# Altium PCB Main.PcbDoc (part 2 of 2)
Units mil, origin at the board's own origin, x right, y up, seen from the top; angles counter-clockwise.
Board outline 5112 x 2752 mil, 4 copper layers (Signal Layer 1, Ground Plane, Voltage Plane, Signal Layer 2), stack 40.4 mil thick; 233 components, 150 nets, 676 pads, 338 vias.
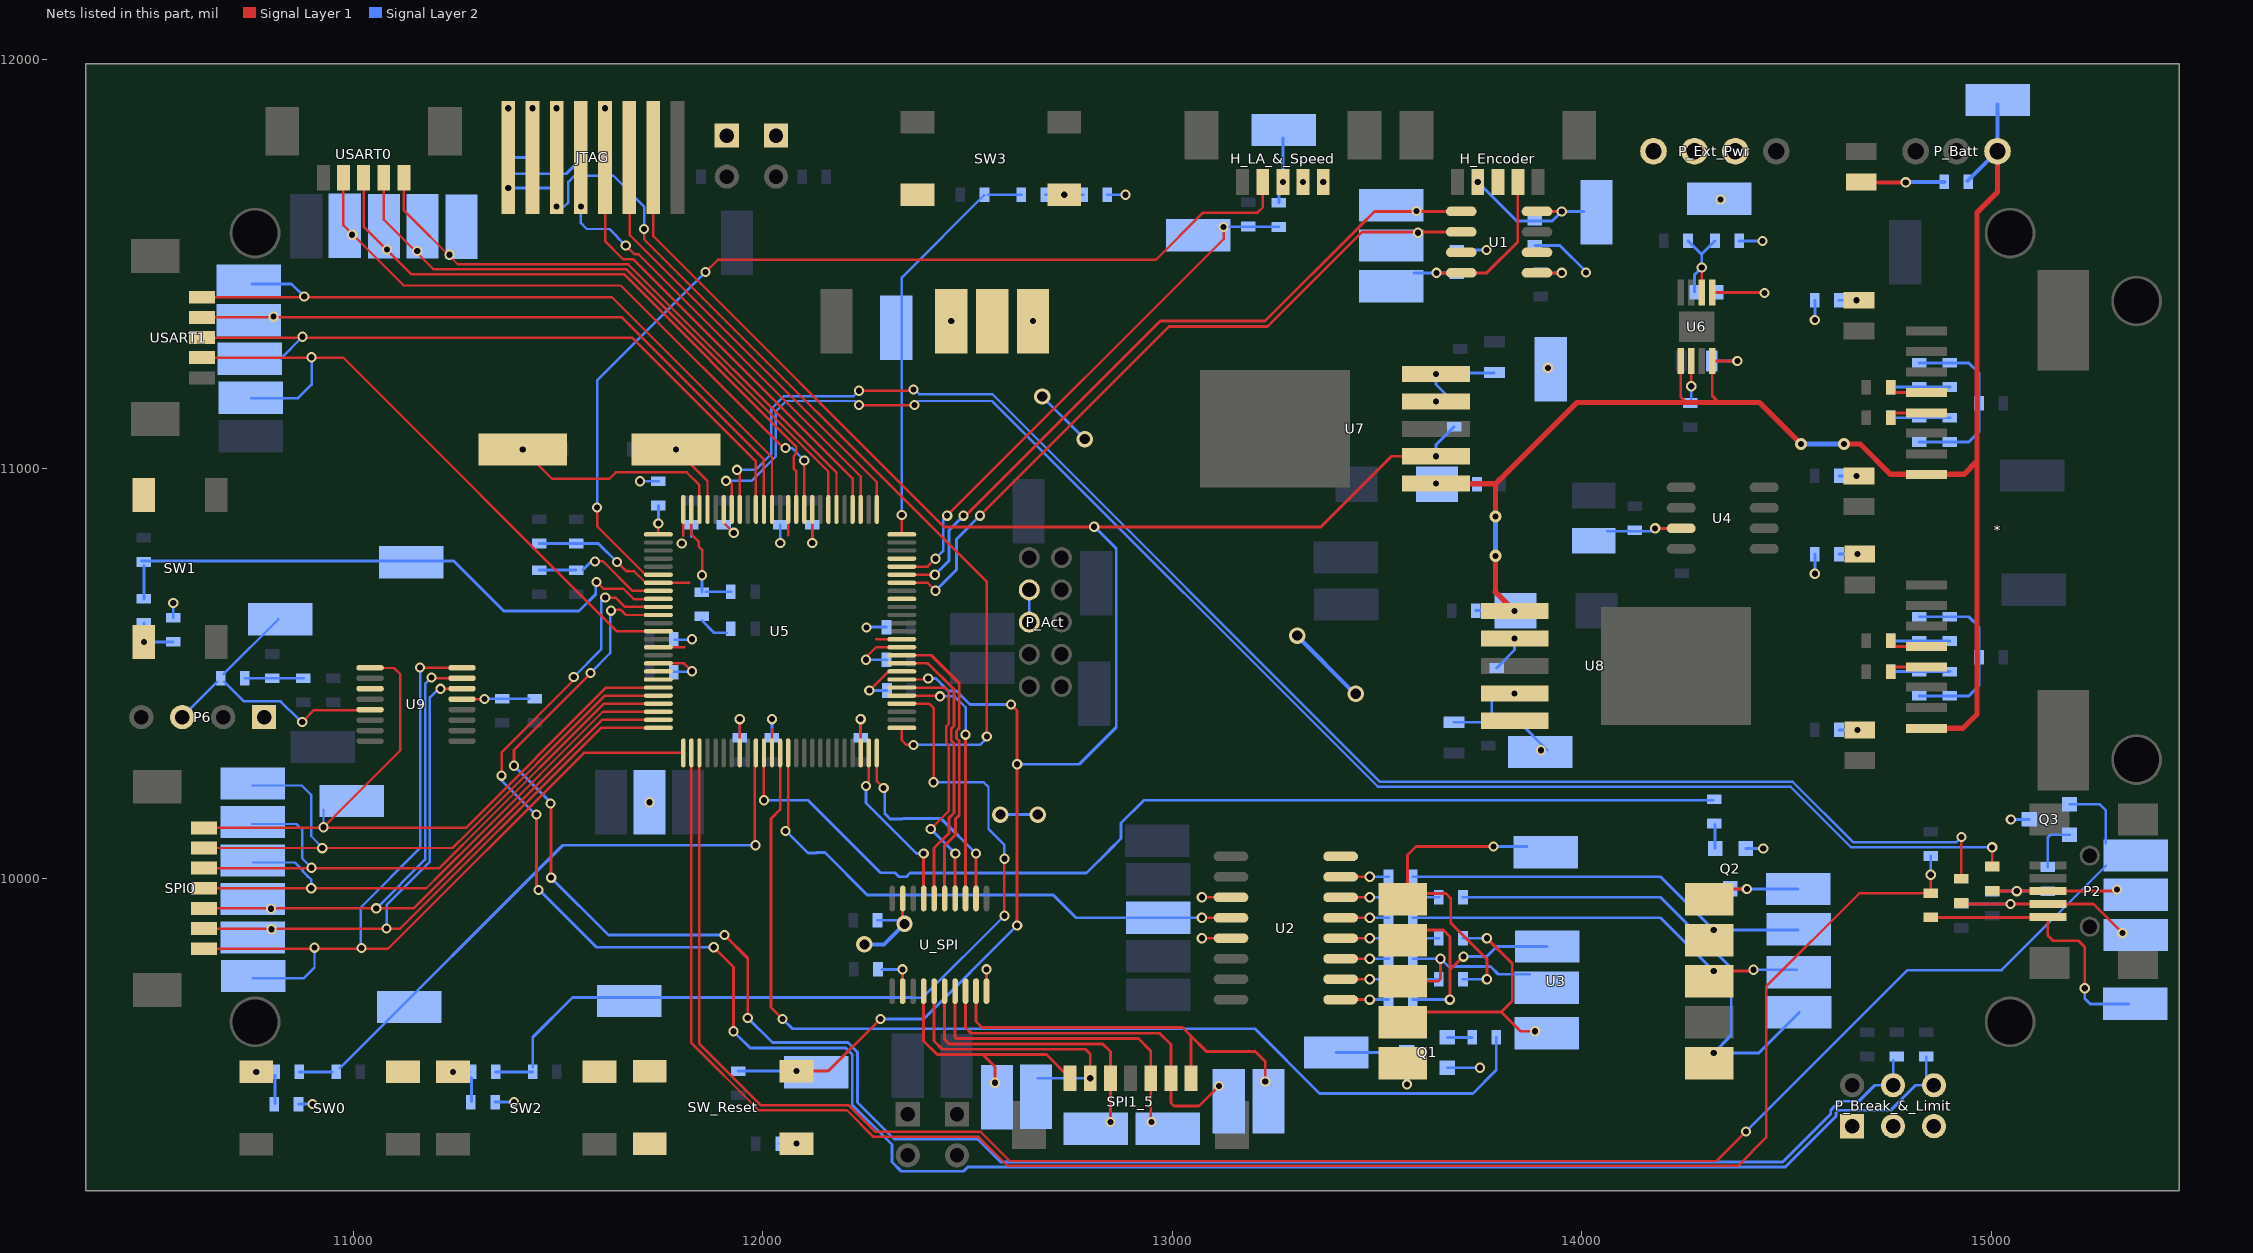
[diagram p4: the nets of this part, all layers, seen from the top]

## Via types
v1: diameter 25, hole 15, Signal Layer 1 to Signal Layer 2, 324 vias
v2: diameter 40, hole 25, Signal Layer 1 to Signal Layer 2, 10 vias
v3: diameter 30, hole 15, Signal Layer 1 to Signal Layer 2, 4 vias

## Nets (pads, with @x,y where several pads share a name; then routed paths per layer and width w, separated by ;. In a path a pad name is that pad's centre, name@x,y a point inside that pad or via, vN(x,y) a via of type N, cw(c..) or ccw(c..) an arc to the next point about the centre after c; other vN are vias at no path point) (continued)
LED_ENABLE: TP_LED_BI/BRO.1 U2.4 U5.39 | length 1381.2
  Signal Layer 1 w6: v1(12055,10115) 12056.68,10115 12061.68,10110 U5.39@12061.68,10305.76
  Signal Layer 1 w7: v1(13072,9903) U2.4@13143.14,9903
  Signal Layer 2 w7: v1(12055,10115) 12056.68,10115 12110.53,10061.15 12130.46,10061.15 12131.31,10062 12151.38,10062 12254.38,9959 12708.77,9959 12764.77,9903 v1(13072,9903)
LED_SELECT_LEFT: R17.2 U5.38 | length 2591.3
  Signal Layer 1 w6: 12042,10167 U5.38@12042,10305.76
  Signal Layer 1 w7: 12020,9688 12020,9684 v1(12048,9656) ; 12020,9689 12020,10145 12042,10167
  Signal Layer 2 w7: v1(12048,9656) 12072,9632 13201.57,9632 13359.36,9474.21 13734.21,9474.21 13791.06,9531.06 R17.2@13791.06,9611
LED_SELECT_RIGHT: R18.2 U5.36 | length 2611.3
  Signal Layer 1 w6: v1(12002.63,10190) U5.36@12002.63,10305.76
  Signal Layer 2 w7: v1(12002.63,10190) 12110,10190 12287,10013 12322.32,10013 12332.32,10003 12350.55,10003 12359.55,10012 12790.62,10012 12844.62,10066 12844.62,10066.62 12874.76,10096.76 12874.76,10134.31 12930.45,10190 R18.2@14320.94,10190
LIMIT_SENSE1: P_Break_&_Limit.4 R12.1 U5.11 | length 4772.3
  Signal Layer 1 w6: v1@11630,10648 11630.5,10647.5 11638,10655 11653.41,10655 11666.04,10642.37 U5.11@11744.76,10642.37
  Signal Layer 1 w7: v1(11392.08,10274.08) 11392,10274.16 11392,10312.38 11579,10499.38 v1(11579,10501) ; v1(11481.08,10182.08) 11482.84,10180.32 11482.84,10001 v1(11482.92,10000.92) ; v1(11906.08,9861.08) 11963,9804.16 11963,9658.16 v1(11963.08,9658.08)
  Signal Layer 2 w6: v1(11579,10501) 11627.08,10549.08 11627.08,10645.08 v1@11630,10648 ; P_Break_&_Limit.4@14760,9494 R12.1@14760,9555
  Signal Layer 2 w7: v1(11392.08,10274.08) 11481.08,10185.08 v1(11481.08,10182.08) ; v1(11482.92,10000.92) 11622.68,9861.16 11906,9861.16 v1(11906.08,9861.08) ; v1(11963.08,9658.08) 12023.16,9598 12207.93,9598 12231.24,9574.69 12231.24,9452.14 12320.4,9362.98 12524.63,9362.98 12580.62,9307 14491.38,9307 14607.97,9423.59 14607.97,9432.85 14630.1,9454.97 14676.17,9454.97 14715.19,9494 P_Break_&_Limit.4@14760,9494
  other v1: 11629,10653
LIMIT_SENSE2: P_Break_&_Limit.6 R13.1 U5.10 | length 5004.4
  Signal Layer 1 w6: v1@11370.16,10252.16 v1(11362,10250) 11362,10261.16 11362,10307 11538,10483 v1(11538,10491) ; v1@11623,10685 11640.38,10685 11663.32,10662.06 U5.10@11744.76,10662.06
  Signal Layer 1 w7: v1@11447,9979 v1@11447,10148 ; v1(11447,10155) v1@11454,10155 ; v1(11452,9971) v1@11453,9971 ; v1@11884.16,9826.84 11928,9783 v1(11928,9626)
  Signal Layer 2 w6: v1@11538.5,10491.5 11605.16,10558.16 11605.16,10677 11615,10677 v1(11615,10685) ; R13.1@14841,9564 14841,9513 P_Break_&_Limit.6@14860,9494
  Signal Layer 2 w7: v1@11363,10245 11363,10237 v1@11439.84,10160.16 ; v1(11447,10155) v1@11454,10155 ; v1(11452,9971) v1@11453,9971 ; v1@11461,9964 11594,9831 v1@11876,9831 ; v1@11935.86,9618.14 11969,9585 12202.55,9585 12218.24,9569.31 12218.24,9445.76 12314.97,9349.03 12314.97,9306.83 12337.83,9283.97 12490.17,9283.97 12500.19,9294 ; 12501,9294 14496.77,9294 14620.97,9418.2 14620.97,9427.46 14626.54,9433.03 14754.22,9433.03 14815.19,9494 P_Break_&_Limit.6@14860,9494
  other v1: 11880,9831
Net*_4: *.4 R5.1 | length 81.2
  Signal Layer 1 w7: R5.1@14754,11185.65 *.4@14835.22,11185.65
Net*_5: *.5 R2.1 | length 81.2
  Signal Layer 1 w7: R2.1@14754,11135.46 *.5@14835.22,11135.46
Net*_12: *.12 R33.1 | length 82.2
  Signal Layer 1 w7: R33.1@14754,10565.57 *.12@14836.2,10565.57
Net*_13: *.13 R30.1 | length 81.2
  Signal Layer 1 w7: R30.1@14754,10515.38 *.13@14835.22,10515.38
Net*_17: *.17 R37.2 | length 42.8
  Signal Layer 2 w7: R37.2@14628.06,11411.05 v1(14670.85,11411.05)
Net*_19: *.19 R38.2 | length 42.8
  Signal Layer 2 w7: R38.2@14628.06,10981.91 v1(14670.85,10981.91)
Net*_21: *.21 R39.2 | length 44.8
  Signal Layer 2 w7: R39.2@14628.06,10790.97 v1(14672.82,10790.97)
Net*_23: *.23 R40.2 | length 44.8
  Signal Layer 2 w7: R40.2@14628.06,10361.83 v1(14672.82,10361.83)
NetC1_2: C1.2 R1.2 R4.2 R27.2 R28.2 | length 455.7
  Signal Layer 2 w7: R1.2@14824,11064.94 14944.94,11064.94 14969.94,11089.94 14969.94,11233.06 14944.94,11258.06 R27.2@14824,11258.06
NetC5_2: C5.2 R29.2 R32.2 R35.2 R36.2 | length 455.7
  Signal Layer 2 w7: R29.2@14824,10444.94 R32.2@14899,10444.94 14944.94,10444.94 14969.94,10469.94 C5.2@14969.94,10539 14969.94,10613.06 14944.94,10638.06 R35.2@14899,10638.06 R36.2@14824,10638.06
NetC6_2: C6.2 R9.2 R10.1 | length 143.9
  Signal Layer 2 w6: R9.2@10735.06,10488 R10.1@10877,10488 R10.1@10879,10488
NetC8_1: C8.1 U5.1 | length 70.4
  Signal Layer 1 w6: U5.1@11744.76,10839.22 v1(11744.76,10865.76)
  Signal Layer 2 w7: v1(11744.76,10865.76) C8.1@11744.76,10909.61
NetC10_2: C10.2 R60.1 | length 73.4
  Signal Layer 2 w7: R60.1@11851,10629 11881,10599 C10.2@11911.94,10599
NetC11_2: C11.2 R60.2 U5.99 | length 273.4
  Signal Layer 1 w6: U5.99@11825.46,10900.24 11825.46,10838.94 11843.65,10820.76 11843.65,10809.09 11851.46,10801.28 v1(11851.46,10739.35)
  Signal Layer 2 w7: R60.2@11851.46,10698.52 v1(11851.46,10739.35) ; R60.2@11861,10699 C11.2@11921.94,10699
NetC15_1: C15.1 R62.1 R64.2 U6.2 | length 253.2
  Signal Layer 1 w7: U6.2@14292.87,11429.8 v1(14292.87,11491.13)
  Signal Layer 2 w7: R64.2@14259.13,11556.13 14292.87,11522.39 v1(14292.87,11491.13) 14275.07,11473.34 C15.1@14275.07,11431.13 ; 14292.87,11523.93 R62.1@14325.07,11556.13
NetC18_2: C18.2 U7.4 | length 43.2
  Signal Layer 2 w7: C18.2@13600.87,11163.93 v1(13644.06,11163.93)
NetC19_2: C19.2 U6.6 | length 100.1
  Signal Layer 1 w7: v1(14267.28,11201.13) U6.6@14267.28,11262.47
  Signal Layer 2 w7: C19.2@14267.28,11162.39 v1(14267.28,11201.13)
NetC24_2: C24.2 U8.4 | length 43.2
  Signal Layer 2 w7: v1(13835.94,10451.07) C24.2@13879.13,10451.07
NetC40_2: C40.2 U5.97 X1.2 | length 227.1
  Signal Layer 1 w6: v1(11787.71,11046.78) 11864.83,10969.65 U5.97@11864.83,10900.24
  Signal Layer 2 w7: C40.2@11739.06,11046.78 v1(11787.71,11046.78)
NetC41_1: C41.1 U5.98 X1.1 | length 581.7
  Signal Layer 1 w6: v1(11413.69,11046.78) 11485.47,10975 11625,10975 11641.06,10991.06 11813.94,10991.06 11845.15,10959.85 U5.98@11845.15,10900.24
  Signal Layer 2 w7: v1(11413.69,11046.78) C41.1@11455,11046.78
NetD_Power_1: D_Power.1 R66.1 | length 203.4
  Signal Layer 1 w10: D_Power.1@14682.6,11699 v1(14791,11699)
  Signal Layer 2 w10: v1@14790,11700 R66.1@14885,11700
NetH1_3: H_LA_&_Speed.3 R67.2 TP_Speed_H.1 | length 162.1
  Signal Layer 2 w7: R67.2@13260,11649.06 13260,11690 v1(13270,11700) TP_Speed_H.1@13270,11807
NetH2_2: H_Encoder.2 R7.1 TP_Encoder_A.1 U1.4 | length 368.6
  Signal Layer 1 w7: U1.4@13890.52,11628 v1(13951,11628)
  Signal Layer 2 w7: v1(13745.79,11700) 13840.79,11605 R7.1@13885,11605 13928,11605 v1(13951,11628) TP_Encoder_A.1@14005,11628
NetH2_4: H_Encoder.4 R8.1 TP_Encoder_B.1 U1.8 | length 472.7
  Signal Layer 1 w7: v1(13645,11478) U1.8@13705.48,11478 13768,11478 13843.62,11553.62 H_Encoder.4@13843.62,11699.41
  Signal Layer 2 w7: TP_Encoder_B.1@13590,11478 v1(13645,11478) R8.1@13687,11478
NetJTAG_2: JTAG.2 R49.2 | length 45
  Signal Layer 2 w7: R49.2@11437.36,11835 v1(11437.36,11880)
NetP2_1: P2.1 R70.2 TP_MONITOR.1 | length 635.4
  Signal Layer 1 w7: R70.2@14852,9903.94 P2.1@15100.94,9903.94 ; P2.1@15137.94,9905.01 15137.94,9860.06 15151,9847 15213,9847 15228,9832 v1(15228,9731)
  Signal Layer 2 w7: v1(15228,9731) 15228,9706 15242,9692 TP_MONITOR.1@15336,9692
NetP2_2: P2.2 R71.2 R74.2 TP_DDM.1 | length 539.2
  Signal Layer 1 w7: R71.2@14929.44,9936.5 v1(15047,9936.5) P2.2@15137.94,9936.5 15249.5,9936.5 v1(15320,9866)
  Signal Layer 2 w7: R74.2@14927.55,9936.5 v1(15047,9936.5)
NetP2_3: P2.3 R69.1 R72.2 R75.2 TP_DDP.1 | length 440.7
  Signal Layer 1 w7: R72.2@15002.94,9968 v1(15062,9968) P2.3@15137.94,9968 15303,9968 v1(15307,9972)
  Signal Layer 2 w7: R75.2@15002.94,9968 v1(15062,9968) R69.1@15137.94,9968
NetQ1_1: Q1.1 R17.1 | length 60.4
  Signal Layer 2 w7: Q1.1@13671.61,9611 R17.1@13732,9611
NetQ1_3: Q1.3 TP_LED_LEFT.1 U3.10 | length 310.6
  Signal Layer 1 w7: v1(13572.79,9496.21) U3.10@13572.79,9571.8
  Signal Layer 2 w7: TP_LED_LEFT.1@13400,9574 Q1.3@13565,9574 ; v1(13572.79,9496.21) Q1.3@13572.79,9566.21
NetQ2_1: Q2.1 R18.1 | length 58.2
  Signal Layer 2 w7: Q2.1@14325.6,10072.21 R18.1@14325.6,10130.4
NetQ2_3: Q2.3 TP_LED_RIGHT.1 U3.5 | length 245.2
  Signal Layer 1 w7: U3.5@14322.02,9973 v1(14403,9973)
  Signal Layer 2 w7: Q2.3@14363.79,9973 v1(14403,9973) TP_LED_RIGHT.1@14528,9973
NetQ3_2: Q3.2 R69.2 | length 127.9
  Signal Layer 2 w7: R69.2@15137.94,10027.06 15137.94,10098.94 15144.8,10105.8 Q3.2@15191.09,10105.8
NetR1_1: R1.1 R3.2 R4.1 | length 145
  Signal Layer 2 w7: R3.2@14754,11124 R4.1@14899,11124
NetR6_2: R6.2 U1.1 | length 110.4
  Signal Layer 1 w7: U1.1@13890.52,11478 v1(13951,11478)
  Signal Layer 2 w7: R6.2@13901.06,11478 v1(13951,11478)
NetR19_1: R19.1 TP_LED_Sa.1 U3.3 | length 992.1
  Signal Layer 1 w7: v1(14322.02,9773) 14416,9773 v1(14419,9776)
  Signal Layer 2 w7: R19.1@13587,9903 14192.02,9903 v1(14322.02,9773) ; v1(14419,9776) TP_LED_Sa.1@14524,9776
NetR19_2: R19.2 U2.13 | length 117.1
  Signal Layer 1 w7: U2.13@13410.86,9903 v1(13482,9903)
  Signal Layer 2 w7: v1(13482,9903) R19.2@13527.94,9903
NetR20_1: R20.1 TP_LED_Sb.1 U3.9 | length 606.3
  Signal Layer 1 w7: U3.9@13573.98,9673 13803,9673 ; v1(13768,9853) 13830,9791 13830,9700 13803,9673 ; v1(13886,9626) 13850,9626 13803,9673
  Signal Layer 2 w7: R20.1@13710,9853 v1(13768,9853)
NetR20_2: R20.2 U2.12 | length 240.1
  Signal Layer 1 w7: U2.12@13410.86,9853 v1(13482,9853)
  Signal Layer 2 w7: v1(13482,9853) R20.2@13650.94,9853
NetR21_1: R21.1 TP_LED_Sc.1 U3.8 | length 442.2
  Signal Layer 1 w7: U3.8@13562.98,9748 13649,9748 13655,9754 v1(13655,9803)
  Signal Layer 2 w7: R21.1@13589,9803 v1(13655,9803) 13674,9784 13777,9784 13796,9765 TP_LED_Sc.1@13872,9765
NetR21_2: R21.2 U2.11 | length 117.1
  Signal Layer 1 w7: U2.11@13410.86,9803 v1(13482,9803)
  Signal Layer 2 w7: v1(13482,9803) R21.2@13527.94,9803
NetR22_1: R22.1 TP_LED_Sd.1 U3.6 | length 767.1
  Signal Layer 1 w7: U3.6@13573.98,9962 13573.98,10055.98 13595,10077 v1(13784,10077) ; U3.6@13604,9962 13668,9962 13680,9950 13680,9890 13768,9802 v1(13768,9753)
  Signal Layer 2 w7: R22.1@13710,9753 v1(13768,9753) ; v1(13784,10077) TP_LED_Sd.1@13866,10077
NetR22_2: R22.2 U2.10 | length 240.1
  Signal Layer 1 w7: U2.10@13410.86,9753 v1(13482,9753)
  Signal Layer 2 w7: v1(13482,9753) R22.2@13650.94,9753
NetR23_1: R23.1 TP_LED_Se.1 U3.7 | length 615.7
  Signal Layer 1 w7: U3.7@13573.98,9873 13662,9873 13677.63,9857.37 13677.63,9776 v1(13677.63,9703) ; 13678,9776 13710,9808 v1(13711,9808)
  Signal Layer 2 w7: R23.1@13587,9703 v1(13677.63,9703) ; v1(13711,9808) 13767,9808 13792,9833 TP_LED_Se.1@13915,9833
NetR23_2: R23.2 U2.9 | length 117.1
  Signal Layer 1 w7: U2.9@13410.86,9703 v1(13482,9703)
  Signal Layer 2 w7: v1(13482,9703) R23.2@13527.94,9703
NetR24_1: R24.1 TP_LED_Sf.1 U3.4 | length 994.8
  Signal Layer 2 w7: R24.1@13587,10003 14192.02,10003 v1(14322.02,9873) TP_LED_Sf.1@14528,9873
NetR24_2: R24.2 U2.15 | length 117.1
  Signal Layer 1 w7: U2.15@13410.86,10003 v1(13482,10003)
  Signal Layer 2 w7: v1(13482,10003) R24.2@13527.94,10003
NetR25_1: R25.1 TP_LED_Sg.1 U3.1 | length 1201.5
  Signal Layer 2 w7: R25.1@13710,9953 14192,9953 14365,9780 14365,9615.98 v1(14322.02,9573) 14432,9573 TP_LED_Sg.1@14531,9672
NetR25_2: R25.2 U2.14 | length 240.1
  Signal Layer 1 w7: U2.14@13410.86,9953 v1(13482,9953)
  Signal Layer 2 w7: v1(13482,9953) R25.2@13650.94,9953
NetR26_2: R26.2 R27.1 R28.1 | length 145
  Signal Layer 2 w7: R26.2@14754,11199 R28.1@14899,11199
NetR29_1: R29.1 R31.2 R32.1 | length 145
  Signal Layer 2 w7: R31.2@14754,10504 R32.1@14899,10504
NetR34_2: R34.2 R35.1 R36.1 | length 145
  Signal Layer 2 w7: R34.2@14754,10579 R35.1@14899,10579
NetR45_1: R45.1 R50.1 SW1.3 SW1.4 | length 117.2
  Signal Layer 2 w7: R50.1@10488.52,10622.73 v1(10488.52,10576.87) R45.1@10559.87,10576.87
NetR52_1: R52.1 R53.1 SW2.3 SW2.4 | length 98.9
  Signal Layer 2 w7: v1(11242.87,9526.48) R53.1@11283.52,9526.48 ; R52.1@11288.73,9454.73 R53.1@11288.73,9513
NetR54_1: R54.1 R55.1 SW3.3 SW3.4 | length 91.7
  Signal Layer 2 w7: R55.1@12690.27,11668.52 v1(12736.13,11668.52) R54.1@12782,11668.52
NetR57_1: R57.1 R58.1 SW0.3 SW0.4 | length 106.2
  Signal Layer 2 w7: v1(10762.87,9526.48) R58.1@10800.52,9526.48 ; R57.1@10808.73,9449.73 R58.1@10808.73,9518.27
NetR59_2: R59.2 U5.58 | length 108.8
  Signal Layer 1 w6: v1(12260,10458) U5.58@12306.57,10504.57
  Signal Layer 2 w7: v1(12260,10458) R59.2@12302.94,10458
NetR61_2: R61.2 SW_Reset.3 SW_Reset.4 | length 40.1
  Signal Layer 2 w7: R61.2@12042.06,9351.52 v1(12082.13,9351.52)
NetR65_1: R65.1 U8.2 | length 90.1
  Signal Layer 2 w7: R65.1@13792,10513 13835.94,10556.94 v1(13835.94,10584.93)
NetR71_1: R71.1 U5.93 | length 3804.6
  Signal Layer 1 w6: v1(11936.92,10996.92) 11943.57,10990.27 U5.93@11943.57,10900.24 ; v1@12239,11186 v1(12235,11190) 12365,11190 v1(12368,11193) ; R71.1@14927,9998 v1(14927,10100)
  Signal Layer 2 w6: v1(11936.92,10996.92) 11981.92,10996.92 12020,11035 12020,11144.97 12052.03,11177 12222,11177 v1(12235,11190) ; v1(12368,11193) 12371,11193 12382,11182 ; 12383.5,11181.5 12560.47,11181.5 13506.97,10235 14514.97,10235 14662.97,10087 14914,10087 v1(14927,10100)
NetR72_1: R72.1 U5.94 | length 3825.2
  Signal Layer 1 w6: v1(11910,10970) 11918,10970 11923.89,10964.11 U5.94@11923.89,10900.24 ; v1(12235,11155) 12323,11155 ; 12324,11155 12323,11155 ; v1(12370,11155) 12323,11155 ; R72.1@15002,10028 v1(15002,10075)
  Signal Layer 2 w6: v1(11910,10970) 11971.97,10970 12032,11030.03 12032,11140 12057,11165 12225,11165 v1(12235,11155) ; v1(12370,11155) 12380,11165 12560,11165 13502,10223 14510,10223 14658,10075 v1(15002,10075)
NetSPI1_5_1: SPI1_5.1 TP_SPI1_SPCK.1 U_SPI.9 | length 973.5
  Signal Layer 1 w7: U_SPI.9@12520.57,9723.81 12520.57,9649.43 12535,9635 13025,9635 13045.64,9614.36 ; SPI1_5.1@13045.64,9511 13045.64,9614.36 ; v1(13227,9503) 13227,9552 13203,9576 13084,9576 13045.64,9614.36
NetSPI1_5_2: SPI1_5.2 TP_SPI1_MOSI.1 U_SPI.8 | length 891.4
  Signal Layer 1 w7: U_SPI.8@12494.98,9723.81 12494.98,9635.02 12509,9621 12969,9621 12996.43,9593.57 SPI1_5.2@12996.43,9511 12996.43,9450.57 13004,9443 13065,9443 v1(13114,9492)
NetSPI1_5_3: SPI1_5.3 TP_SPI1_MISO.1 U_SPI.7 | length 779.1
  Signal Layer 1 w7: U_SPI.7@12469.39,9723.81 12469.39,9610.61 12472,9608 12917,9608 12947.21,9577.79 SPI1_5.3@12947.21,9511 12947.21,9405.79 v1(12949,9404)
NetSPI1_5_5: SPI1_5.5 TP_SPI1_CS2.1 U_SPI.6 | length 707.3
  Signal Layer 1 w7: U_SPI.6@12443.8,9723.81 12443.8,9606.2 12455,9595 12830,9595 12848.79,9576.21 SPI1_5.5@12848.79,9511 12848.79,9404.21 v1(12849,9404)
NetSPI1_5_6: SPI1_5.6 TP_SPI1_CS1.1 U_SPI.5 | length 703.4
  Signal Layer 1 w7: U_SPI.5@12418.2,9723.81 12418.2,9601.8 12438,9582 12788,9582 12799.57,9570.43 v1(12799.57,9511)
  Signal Layer 2 w7: TP_SPI1_CS1.1@12672,9511 v1(12799.57,9511)
NetSPI1_5_7: SPI1_5.7 TP_SPI1_CS0.1 U_SPI.4 | length 598.5
  Signal Layer 1 w7: U_SPI.4@12392.61,9723.81 12392.61,9602.39 12426,9569 12537,9569 ; v1(12567,9500) 12567,9539 12537,9569 ; SPI1_5.7@12750.36,9511 12692.36,9569 12537,9569
PWM3: U5.67
RAW: P6.3 R9.1 TP_ACC_CUR_SENSE.1 U9.5 | length 729.1
  Signal Layer 1 w6: v1@10883,10381 10883,10389 10904,10410 U9.5@11040,10410
  Signal Layer 2 w6: P6.3@10580,10392 R9.1@10667,10479 ; R9.1@10683,10498 TP_ACC_CUR_SENSE.1@10817,10632 ; R9.1@10685,10479 10732.47,10431.53 10822.47,10431.53 10865.78,10388.22 10865.78,10381 v1@10883,10381
  other v1: 10875,10381
RST: C9.1 JTAG.7 R63.1 SW_Reset.1 SW_Reset.2 TP_Reset.1 U5.57 U7.2 | length 5021.6
  Signal Layer 1 w6: JTAG.7@11732.64,11760 11732.64,11567.36 12442.5,10857.5 ; U5.57@12339.24,10484.89 v1@12401.89,10484.89
  Signal Layer 1 w7: v1(12082.13,9528.48) 12159.48,9528.48 v1(12287,9656) ; v1@12401.89,10484.89 v1(12404,10487) ; 12442.5,10857.5 13362.5,10857.5 13535.07,11030.07 v1(13644.06,11030.07) ; v1(12606,10424) 12621,10409 v1(12621,10278) v1(12621,9884)
  Signal Layer 2 w7: C9.1@11939.52,9528.48 v1(12082.13,9528.48) ; v1(12287,9656) 12393,9656 v1(12621,9884) ; v1(12404,10487) 12423,10487 12446.76,10463.24 12446.76,10462.69 12452.32,10457.13 12472.55,10457.13 12505.68,10424 v1(12606,10424) ; v1@12621,10279 v1(12621,10278) 12772.55,10278 12862.87,10368.32 12862.87,10805.13 12810,10858 v1(12809,10858) ; v1(13644.06,11030.07) 13644.06,11058.06 R63.1@13688,11102
RTS0: TP_URT_RTS0.1 U5.85 USART0.2 | length 1598.7
  Signal Layer 1 w6: USART0.2@10975.79,11710 10975.79,11594.21 11123,11447 11653,11447 12050,11050 v1(12055,11050) ; U5.85@12101.06,10900.24 v1(12101.06,11020)
  Signal Layer 2 w6: v1(12055,11050) 12071.06,11050 v1(12101.06,11020)
  other v1: 10997,11571
RTS1: TP_URT_RTS1.1 U5.13 USART1.2 | length 1618.7
  Signal Layer 1 w6: USART1.2@10630,11270.79 10975.21,11270.79 11643.5,10602.5 U5.13@11744.26,10602.5
  Signal Layer 2 w6: TP_URT_RTS1.1@10751,11172 10865,11172 10898,11205 v1(10898,11272)
RXD0: TP_URT_RXD0.1 U5.81 USART0.5 | length 1491
  Signal Layer 1 w6: USART0.5@11123.43,11710 11123.43,11630.57 11255,11499 11671,11499 12179.8,10990.2 U5.81@12179.8,10900.24
  other v1: 11235,11522
RXD1: TP_URT_RXD1.1 U5.89 USART1.5 | length 1822.4
  Signal Layer 1 w6: USART1.5@10630,11418.43 11631.57,11418.43 12022.32,11027.68 U5.89@12022.32,10900.24
  Signal Layer 2 w7: TP_URT_RXD1.1@10752,11451 10849,11451 v1(10880,11420)
SCK0: TP_URT_SCK0.1 U5.86 USART0.3 | length 1556.9
  Signal Layer 1 w6: USART0.3@11025,11710 11025,11591 11141,11475 11660.41,11475 12081.37,11054.04 12081.37,11036.37 12075,11030 12075,11000 12081.37,10993.63 U5.86@12081.37,10900.24
  other v1: 11082,11535
SCK1: TP_URT_SCK1.1 U5.91 USART1.3 | length 1671.6
  Signal Layer 1 w6: USART1.3@10630,11320 11680,11320 11982.94,11017.06 U5.91@11982.94,10900.24
  Signal Layer 2 w6: TP_URT_SCK1.1@10822,11268 v1(10876,11322)
SENSOR_ENCODER_COUNTER_1: TP_En_Count_2.1 U1.6 U5.69 | length 1781
  Signal Layer 1 w6: U5.69@12339.24,10721.11 12402.12,10721.11 v1(12421.49,10701.74)
  Signal Layer 1 w7: v1(12530,10885) 12992,11347 13232,11347 13463,11578 13645,11578 U1.6@13705.48,11578
  Signal Layer 2 w7: v1(12421.49,10701.74) 12472.5,10752.75 12472.5,10827.5 v1(12530,10885)
  other v1: 13600,11576
SENSOR_ENCODER_COUNTER_2: TP_En_Count_1.1 U1.5 U5.70 | length 1783.4
  Signal Layer 1 w6: U5.70@12339.24,10740.8 v1(12420,10740.8)
  Signal Layer 1 w7: v1(12490,10885) 12495.35,10885 12970.35,11360 13226.62,11360 13457.62,11591 13457.62,11591.62 13494,11628 U1.5@13705.48,11628
  Signal Layer 2 w7: v1(12420,10740.8) 12455,10775.8 12455,10850 12480,10875 12490,10875 v1(12490,10885)
  other v1: 13596,11629
SENSOR_LA_POSITION: H_LA_&_Speed.2 U5.6 | length 2386.3
  Signal Layer 1 w6: v1(11595,10905) 11595,10859 U5.6@11713.2,10740.8 ; v1(11860,11480) 11890,11510 12960,11510 13075,11625 13208,11625 13220.79,11637.79 H_LA_&_Speed.2@13220.79,11700
  Signal Layer 2 w6: v1(11595,10905) 11595,11215 v1(11860,11480)
SENSOR_SPEED: R67.1 R68.2 TP_Speed_L.1 U5.71 | length 1331.8
  Signal Layer 1 w6: U5.71@12339.24,10760.48 12402.12,10760.48 v1(12421.49,10779.85) ; v1(12450,10885) 13125,11560 v1(13125,11590) v1@13130,11590
  Signal Layer 2 w6: v1(12421.49,10779.85) 12440,10798.36 12440,10875 v1(12450,10885) ; v1(13125,11590) R67.1@13260,11590
SPI0_MISO: SPI0.3 TP_SPI0_MISO.1 U5.24 U9.15 | length 1995.6
  Signal Layer 1 w6: SPI0.3@10635,9925.79 11146.82,9925.79 11599.81,10378.78 11607.46,10386.46 U5.24@11744.76,10386.46 ; v1(11191,10490) 11193.02,10487.98 U9.15@11265.2,10487.98
  Signal Layer 2 w6: v1(11056,9926) 11175,10045 11175,10474 v1(11191,10490)
  other v1: 10799,9925
SPI0_MOSI: SPI0.2 TP_SPI0_MOSI.1 U5.25 U9.14 | length 2017.8
  Signal Layer 1 w6: SPI0.2@10635,9876.57 11114.57,9876.57 11604.78,10366.78 U5.25@11744.76,10366.78 ; v1(11213,10462) 11208,10462 11208.39,10462.39 U9.14@11265.2,10462.39
  Signal Layer 2 w6: v1(11081,9877) 11081,9934.03 11187,10040.03 11187,10441 11208,10462 v1(11213,10462)
  other v1: 10800,9875
SPI0_NPCS0: SPI0.7 TP_SPI0_CS0.1 U5.20 U9.1 | length 1825.6
  Signal Layer 1 w6: SPI0.7@10635,10122.64 11274.64,10122.64 11617.2,10465.2 U5.20@11744.76,10465.2 ; v1(10927,10124) 11114.5,10311.5 11114.5,10497.91 11099.41,10513 U9.1@11041.36,10513
  Signal Layer 2 w6: v1(10927,10124) TP_SPI0_CS0.1@10927,10167
SPI0_NPCS1: SPI0.6 TP_SPI0_CS1.1 U5.21 | length 1556.6
  Signal Layer 1 w6: SPI0.6@10635,10073.43 11242.43,10073.43 11279.61,10110.61 ; 11279.61,10110.64 11614.49,10445.52 U5.21@11744.76,10445.52
  Signal Layer 2 w6: TP_SPI0_CS1.1@10753,10226 10874,10226 10897,10203 10897,10102 v1@10924,10075
  other v1: 10924,10073
SPI0_NPCS2: SPI0.5 TP_SPI0_CS2.1 U5.22 | length 1506.5
  Signal Layer 1 w6: SPI0.5@10635,10024.21 11210.21,10024.21 11247.4,10061.4 ; 11247.4,10061.43 11291.61,10105.64 11611.78,10425.83 U5.22@11744.76,10425.83
  Signal Layer 2 w6: TP_SPI0_CS2.1@10753,10132 10861,10132 10875,10118 10875,10048 v1(10898,10025)
SPI0_NPCS3: SPI0.4 TP_SPI0_CS3.1 U5.23 | length 1471.2
  Signal Layer 1 w6: SPI0.4@10635,9975 11178,9975 11215.18,10012.18 11303.61,10100.64 11303.61,10100.7 11609.06,10406.15 U5.23@11744.76,10406.15
  Signal Layer 2 w6: TP_SPI0_CS3.1@10754,10038 10857,10038 10876.5,10018.5 10876.5,10016.09 10889.09,10003.5 10889.5,10003.5 10897,9996 v1(10897,9975)
SPI0_SPCK: SPI0.1 TP_SPI0_SPCK.1 U5.26 U9.16 | length 2431.5
  Signal Layer 1 w6: SPI0.1@10635,9827.36 11084.36,9827.36 11562.76,10305.76 U5.26@11805.78,10305.76 ; v1(11163,10514) 11163.43,10513.57 U9.16@11265.2,10513.57
  Signal Layer 2 w6: TP_SPI0_SPCK.1@10754,9755 10878,9755 10905,9782 v1(10905,9830) ; v1(11020,9829) 11018,9831 11018,9927.94 11163,10072.94 11163,10504 11158,10509 v1(11163,10514)
SPI1_MISO: U5.56 U_SPI.14 | length 672
  Signal Layer 1 w6: U5.56@12339.24,10465.2 12444.8,10465.2 12454,10456 12454,10376.38 12447.5,10369.88 12447.5,10330.53 12454,10324.03 12454,10164 v1(12410,10120)
  Signal Layer 1 w7: U_SPI.14@12469.39,9950.19 v1@12469.39,10060
  Signal Layer 2 w7: v1(12410,10120) v1@12469.39,10060.61
  other v1: 12470,10060
SPI1_MOSI: U5.55 U_SPI.13 | length 634.4
  Signal Layer 1 w6: U5.55@12339.24,10445.52 12430.69,10445.52 v1(12432.5,10443.7)
  Signal Layer 1 w7: U_SPI.13@12494.98,9950.19 v1(12495,10350.2)
  Signal Layer 2 w6: v1(12432.5,10443.7) 12468.3,10443.7 12495,10417 v1(12495,10350.2)
SPI1_NPCS0: U5.49 U_SPI.17 | length 427
  Signal Layer 1 w6: v1(12251.76,10225) 12258.54,10231.78 U5.49@12258.54,10305.76
  Signal Layer 1 w7: U_SPI.17@12392.61,9950.19 v1(12392.61,10060)
  Signal Layer 2 w7: v1(12251.76,10225) 12251.76,10183.24 12375,10060 v1(12392.61,10060)
SPI1_NPCS1: U5.59 U_SPI.16 | length 689.8
  Signal Layer 1 w6: U5.59@12339.24,10524.26 12400.74,10524.26
  Signal Layer 1 w7: 12400.74,10524.26 12403.42,10524.26 12466.5,10461.18 12466.5,10371.2 12460,10364.7 12460,10335.71 12466.5,10329.21 12466.5,10158.82 12455,10147.32 12455,10110 12418.2,10073.2 U_SPI.16@12418.2,9950.19
SPI1_NPCS2: U5.60 U_SPI.15 | length 714.1
  Signal Layer 1 w6: U5.60@12339.24,10543.94 12411.06,10543.94
  Signal Layer 1 w7: 12411.06,10543.94 12479.5,10475.5 12479.5,10365.82 12473,10359.32 12473,10341.09 12479.5,10334.59 12479.5,10153.44 12470,10143.94 12470,10105 12443.8,10078.8 U_SPI.15@12443.8,9950.19
SPI1_SPCK: U5.50 U_SPI.12 | length 540.3
  Signal Layer 1 w6: U5.50@12278.22,10305.76 12278.22,10236.78 v1(12295,10220)
  Signal Layer 1 w7: U_SPI.12@12520.57,9950.19 v1(12520.57,10060)
  Signal Layer 2 w7: v1@12292.5,10217.5 v1@12297.5,10217.5 ; v1(12295,10220) v1@12297.5,10217.5 ; v1@12302.5,10217.5 v1@12297.5,10217.5 ; v1(12520.57,10060) 12435.57,10145 12342.11,10145 12341.11,10144 12311,10144 12297.5,10157.5 v1@12297.5,10217.5
SW0: C44.2 R50.2 TP_S3.1 U5.9 | length 1424.2
  Signal Layer 1 w6: v1(11593.61,10723.25) 11610.36,10706.5 11659.5,10706.5 11684.81,10681.19 U5.9@11712.81,10681.19
  Signal Layer 2 w7: C44.2@10482.94,10774 11245,10774 11367,10652 11551,10652 11592,10693 v1@11592,10723.25 ; R50.2@10488.52,10681.79 C44.2@10488.52,10762.52
SW1: C45.2 R53.2 TP_S2.1 U5.54 | length 2169.3
  Signal Layer 1 w6: U5.54@12339.24,10425.83 12406.17,10425.83 12417.5,10414.5 v1@12417.5,10234.5 ; v1(12590,9908) v1(12590,10047)
  Signal Layer 2 w6: 12361,9708 12390,9708 v1(12590,9908) ; v1(12417,10234) 12539,10234 12551,10222 12551,10120 12590,10081 v1(12590,10047)
  Signal Layer 2 w7: R53.2@11347.79,9526.48 C45.2@11437.94,9526.48 ; C45.2@11438,9539 11438,9611 11535,9708 12361,9708
SW2: C46.2 R55.2 TP_S1.1 U5.75 | length 992.7
  Signal Layer 1 w6: U5.75@12339.24,10839.22 v1(12339.24,10886.76)
  Signal Layer 2 w6: v1(12339.24,10886.76) 12339.24,11467 ; 12339.54,11467 C46.2@12540.54,11668
  Signal Layer 2 w7: C46.2@12550.52,11668.52 R55.2@12631.21,11668.52
SW3: C47.2 R58.2 TP_S0.1 U5.35 | length 1542.6
  Signal Layer 1 w6: v1@11980.63,10081.37 U5.35@11980.63,10303.44
  Signal Layer 2 w7: R58.2@10867.79,9526.48 C47.2@10948.48,9526.48 ; C47.2@10967.46,9536 11511.46,10080 v1(11982,10080)
TCK: JTAG.5 R46.2 U5.79 | length 1169.8
  Signal Layer 1 w6: JTAG.5@11614.53,11760 11614.53,11555.47 11659,11511 11684,11511 12219.17,10975.83 U5.79@12219.17,10900.24
  Signal Layer 2 w7: R46.2@11614.53,11835 v1(11614.53,11880)
TDI: JTAG.3 R48.2 U5.51 | length 2329.4
  Signal Layer 1 w6: v1(11710,11585) 11710,11560 12547,10723 v1(12547,10345.38) ; U5.51@12339.24,10366.78 12339.24,10336.76 12351,10325 v1(12368,10325)
  Signal Layer 2 w6: v1(11496.42,11640) 11515,11640 11525,11650 11525,11700 11540,11715 11635,11715 11710,11640 v1(11710,11585) v1@11710,11575 ; v1(12368,10325) 12530,10325 12547,10342 v1(12547,10345.38)
  Signal Layer 2 w7: R48.2@11496.42,11760 v1(11496.42,11880)
TDO: JTAG.6 U5.76 | length 974.6
  Signal Layer 1 w6: JTAG.6@11675,11625 11675,11570 12278.22,10966.78 U5.76@12278.22,10900.24
TIOB1: U5.72
TMS: JTAG.4 R47.2 U5.78 | length 1105.9
  Signal Layer 1 w6: v1(11665,11545) 11687,11523 11697,11523 12238.85,10981.15 U5.78@12238.85,10900.24
  Signal Layer 2 w6: v1(11555.47,11640) 11555.47,11599.53 11570,11585 11625,11585 v1(11665,11545)
  Signal Layer 2 w7: v1(11555.47,11640) R47.2@11555.47,11685
TWCK: U5.19
TWD: U5.18
TXD0: TP_URT_TXD0.1 U5.82 USART0.4 | length 1535.1
  Signal Layer 1 w6: USART0.4@11074.21,11710 11074.21,11607.79 11195,11487 11665.41,11487 12160.11,10992.3 U5.82@12160.11,10900.24
  other v1: 11156,11531
TXD1: TP_URT_TXD1.1 U5.90 USART1.4 | length 1638.4
  Signal Layer 1 w6: USART1.4@10630,11369.21 11655.79,11369.21 12002.63,11022.37 U5.90@12002.63,10900.24
  other v1: 10805,11371
USB_DISABLE: Q3.1 TP_DISABLE.1 U5.28 | length 4739.6
  Signal Layer 1 w6: U5.28@11845.15,10305.76 11845.15,9594.85 11995,9445 12210,9445 12275,9380 12531.97,9380 12602.97,9309 14329,9309 v1(14401,9381)
  Signal Layer 2 w6: v1@14400,9380 14795,9775 15025,9775 TP_DISABLE.1@15280,10030 ; Q3.1@15191.09,10180.6 15264.4,10180.6 15280,10165 TP_DISABLE.1@15280,10085
USB_MONITOR: R70.1 R73.2 U5.27 | length 4422.2
  Signal Layer 1 w6: U5.27@11825.46,10305.76 11825.46,9597.56 11990.03,9433 12205.03,9433 12270.03,9368 12527,9368 12598,9297 14381,9297 14450,9366 14450,9735 14678,9963 R70.1@14842,9963
  Signal Layer 1 w7: R70.1@14852,9973 v1(14852,10008)
  Signal Layer 2 w7: v1(14852,10008) R73.2@14852,10053.94
V_1.8: C26.1 C28.1 C31.1 C33.1 C35.1 C37.1 C39.1 U5.7 U5.15 U5.37 U5.62 U5.87 U5.100 | length 892
  Signal Layer 1 w6: v1(11644,10772) 11667,10749 11686,10749 U5.7@11713.89,10721.11 ; U5.15@11744.76,10563.63 11807.63,10563.63 ; U5.7@11744.76,10721.11 11819.89,10721.11 ; 11805.78,10835.43 U5.100@11805.78,10900.24 ; U5.37@12022.32,10305.76 12022.32,10363 ; 12061.68,10837.37 U5.87@12061.68,10900.24 ; 12276.37,10583.32 U5.62@12339.24,10583.32
  Signal Layer 2 w7: C26.1@11454,10817 C28.1@11544,10817 11598,10817 v1@11643.5,10771.5 ; C31.1@11784.83,10582.06 v1@11827.94,10582.06 ; 11825.15,10833.56 C39.1@11825.15,10863 ; C33.1@12022.32,10343.32 v1(12022.32,10388) ; v1(12042.31,10818) C37.1@12042.31,10862.69 ; v1@12257,10613 C35.1@12302,10613
  other v1: 11827,10583 12253.29,10611.63 11802,10816.95
V_3.3: C8.2 C13.1 C17.2 C25.1 C27.1 C29.1 C30.1 C32.1 C34.1 C36.1 C38.1 C43.1 C48.2 C49.2 ERASE1.1 H_LA_&_Speed.4 JTAG.1 JTAGESEL1.1 P_Break_&_Limit.1 P_Break_&_Limit.3 P_Break_&_Limit.5 P_Ext_Pwr.2 Q1.2 Q2.2 Q3.3 R37.1 R39.1 R45.2 R46.1 R47.1 R48.1 R49.1 R52.2 R54.2 R57.2 R63.2 TP_3.3.1 TP_3.3_M.1 TP_3.3_T.1 U2.3 U2.5 U5.8 U5.17 U5.33 U5.48 U5.61 U5.84 U5.95 U7.5 U9.13 U_SPI.2 U_SPI.10 | length 2881.3
  Signal Layer 1 w6: v1@11590,10774 11609,10774 11681.57,10701.43 U5.8@11744.76,10701.43 ; U5.17@11744.76,10524.26 11807.63,10524.26 v1(11827,10504.89) ; U5.95@11904.2,10867.8 v1(11929,10843) ; U5.33@11943.57,10305.76 v1(11943.57,10388) ; v1(12120.74,10818) U5.84@12120.74,10900.24 ; U5.48@12238.85,10305.76 v1(12238.85,10388) ; v1@12248.87,10536.13 12276.37,10563.63 U5.61@12339.24,10563.63
  Signal Layer 1 w7: U9.13@11265.2,10436.8 v1@11319.8,10436.8 ; JTAG.1@11378.31,11640 JTAG.1@11378.31,11760 ; U_SPI.2@12341.43,9723.81 v1@12341.43,9777 ; U_SPI.10@12546.16,9723.81 v1@12546.16,9777 ; v1(13072,9853) U2.5@13143.14,9853 ; v1(13072,9953) U2.3@13143.14,9953
  Signal Layer 2 w6: C38.1@11909,10863 v1(11929,10843)
  Signal Layer 2 w7: R45.2@10560,10636.06 v1(10560,10672) ; R57.2@10866.06,9448 v1(10900,9448) ; v1@11321,10438 C49.2@11429,10438 ; R52.2@11346.06,9453 v1(11392,9453) ; R49.1@11378.31,11835 v1(11378.31,11880) ; R48.1@11437.36,11760 11378.31,11760 11378.31,11720 ; C25.1@11454,10752 C27.1@11544,10752 ; R47.1@11496.42,11685 v1(11378.31,11685) 11378.31,11720 ; R46.1@11555.47,11835 11555.47,11755.47 11520,11720 11378.31,11720 ; C27.1@11560,10752 v1@11583.5,10775.5 ; v1(11700,10969.06) C8.2@11745,10969.06 ; C29.1@11782.94,10503.94 v1@11827.94,10503.94 ; C30.1@11943.57,10343 v1(11943.57,10388) ; v1(12120.74,10818) C36.1@12120.74,10863 ; C32.1@12238.85,10343 v1(12238.85,10388) ; v1@12257,10533 C34.1@12302,10533 ; C43.1@12291,9777 v1(12341,9777) ; R54.2@12841.06,11668.52 v1(12885.48,11668.52) ; v1(13644.06,11230.86) 13644.06,11204.99 R63.2@13688,11161.06 ; v1@13646.15,11232.94 C17.2@13703,11232.94 C13.1@13785.36,11232.94 ; Q1.2@13671.21,9536.6 v1(13751.6,9536.6) ; Q2.2@14400.4,10072.21 v1(14443,10072.21) ; v1(14569,10743.02) R39.1@14569,10790.97 ; v1(14569,11363.09) R37.1@14569,11411.05 ; v1(15047.67,10143.2) Q3.3@15092.67,10143.2
  other v1: 12546,9777 11723,10185 11320,10437 12252,10533 11590,10773 13917,11246 12460,11360 13319.21,11700
V_5: C2.1 C3.1 C20.1 C23.2 C42.2 H_Encoder.3 P6.1 P_Ext_Pwr.3 R7.2 R8.2 R65.2 TP_5.1 TP_5_T.1 U1.2 U1.7 U2.16 U4.3 U8.5 U9.3 U_SPI.19 | length 1407.1
  Signal Layer 1 w7: v2@12340,9892 12341.43,9893.43 U_SPI.19@12341.43,9950.19 ; v2(12682,11176) v2@12683,11177 ; v1(14179,10854) U4.3@14242.62,10854
  Signal Layer 2 w7: C42.2@12280.06,9897 12337,9897 v2(12346,9888) ; v2(12580,10155) v2@12669,10155 ; v2(12682,11176) v2(12786,11072) ; v2@13305,10591 v2(13305,10592) ; C20.1@13687.98,10380.4 13847.6,10380.4 ; R8.2@13695,11534.06 v1@13766.94,11534.06 ; C23.2@13780,10389 R65.2@13780,10445 ; 13835.6,10380.4 13847.6,10380.4 ; R7.2@13885.94,11545 13946,11545 14010,11481 v1(14010,11479) ; TP_5.1@13915,10313 13847.6,10380.4 ; C3.1@14063,10847 v1@14172,10847
  Signal Layer 2 w10: v2(12248,9838) 12296,9838 v2(12346,9888) ; v2@13305,10591 13446,10450 v2(13448,10450)
  other v1: 13900,10312 13767,11534
  other v2: 12671,10155
V_12: C15.2 H_LA_&_Speed.5 P_Act.7 P_Act.8 P_Ext_Pwr.4 R62.2 TP_12.1 TP_12_T.1 U6.1 | length 375.7
  Signal Layer 1 w7: U6.1@14318.46,11429.8 v1@14446,11429.8
  Signal Layer 2 w7: P_Act.8@12650.63,10625 P_Act.7@12650.63,10703.74 ; C15.2@14335.47,11429.8 v1@14448,11429.8 ; R62.2@14384.13,11556.13 v1@14441,11556.13
  other v1: 12660,11360 14446,11429 14441,11556 14339,11657 13368.43,11700
V_BATT: *.8 *.16 C12.2 C14.1 C16.2 C21.1 C22.2 P_Batt.1 R66.2 TP_V_BATT.1 U6.5 U6.8 U7.1 U8.1 | length 4084.3
  Signal Layer 1 w7: U6.5@14241.69,11262.47 14241.69,11174.52 14255.07,11161.13 ; U6.8@14318.46,11239.52 14318.46,11177.68 14335,11161.13 ; U6.8@14318.46,11262.47 v1(14379.8,11262.47)
  Signal Layer 1 w13: v1(13644.06,10963.14) 13789,10963.14 13789,10883.14 v3(13789.14,10883.14) ; v3(13789.14,10786.86) 13789.14,10699.14 13788.9,10698.9 v1(13835.94,10651.86) ; 13789.57,10962.57 13988.13,11161.13 14255.07,11161.13 14335,11161.13 14433.87,11161.13 v3(14535,11060) ; v3(14640,11060) 14680,11060 14754.15,10985.85 14932.85,10985.85 14965,11018 ; *.16@14835.22,10365.77 14930.77,10365.77 14965,10400 14965,11625 15015,11675 P_Batt.1@15015,11775
  Signal Layer 2 w7: v1(13644.06,10963.14) C16.2@13742.8,10963.14 ; C22.2@13741.06,10653 C21.1@13834.8,10653 ; C12.2@14317.83,11262.47 v1(14379.8,11262.47)
  Signal Layer 2 w10: R66.2@14942.03,11702.03 P_Batt.1@15015,11775 TP_V_BATT.1@15015,11889
  Signal Layer 2 w13: v3(13789.14,10786.86) v3(13789.14,10883.14) ; v3(14535,11060) v3(14640,11060)
pads on no net: *. *.1 *.2 *.3 *.6 *.9 *.10 *.11 *.14 H_Encoder.0 H_LA_&_Speed.0 P2.0 P2.4 P6.4 SPI0.0 SPI1_5.0 SPI1_5.4 U3.2 U4.5 U5.3 U5.4 U6.7 U7.6 U8.6 U9.7 U9.8 U9.9 U9.10 U9.11 USART0.0 USART1.0
copper on no net:
  other v1: 14376,11884 14819,11884

## Polygon pours and split planes (outlines as drawn)
V_12 on Signal Layer 2 "Signal Layer 1-No Net" (solid, pour order 1003): 15110.29,11975.39 10695.22,11975.39 10695.22,11710.39 10630.22,11645.39 10365.22,11645.39 10365.22,9590.39 10630.22,9590.39 10695.22,9525.39 10695.22,9260.39 15110.22,9260.39 15110.22,9530.39 15166.83,9587 15440.22,9587 15440.22,11645.39 15175.22,11645.39 15110.22,11710.39
GND on Signal Layer 2 "12V Cooling" (solid, pour order 1002): 14420.07,11066.13 14165.07,11066.13 14165.07,11596.13 14420.07,11596.13
V_1.8 on Signal Layer 2 "1.8V Pour" (solid, pour order 1001): 11802,10363 12282,10363 12282,10843 11802,10843
V_5 on Signal Layer 1 "Signal Layer 1-No Net" (solid, pour order 1003): 15110.29,11975.39 10695.22,11975.39 10695.22,11710.39 10630.22,11645.39 10365.22,11645.39 10365.22,9590.39 10630.22,9590.39 10695.22,9525.39 10695.22,9260.39 15110.22,9260.39 15110.22,9530.39 15166.83,9587 15440.22,9587 15440.22,11645.39 15175.22,11645.39 15110.22,11710.39
V_1.8 on Signal Layer 1 "1.8V Pour" (solid, pour order 1000): 11802,10363 12282,10363 12282,10843 11802,10843
GND on Ground Plane (split plane): 15110.42,11760.04 15110.52,11759.04 15110.52,11758.03 15112.45,11738.43 15113.22,11734.56 15118.93,11715.71 15120.44,11712.07 15129.73,11694.7 15130.45,11693.61 15131.92,11691.42 15144.41,11676.2 15147.2,11673.41 15162.42,11660.92 15165.05,11659.16 15165.7,11658.73 15183.07,11649.44 15186.71,11647.93 15205.56,11642.22 15209.43,11641.45 15229.03,11639.52 15230.02,11639.52 15231,11639.42 15231.98,11639.52 15232.97,11639.52 15233.94,11639.71 15234.92,11639.81 15235.24,11639.9 15438.9,11639.9 15438.9,9584.1 15235.24,9584.1 15234.92,9584.19 15233.94,9584.29 15232.97,9584.48 15231.98,9584.48 15231,9584.58 15230.02,9584.48 15229.03,9584.48 15209.43,9582.55 15205.56,9581.78 15186.71,9576.07 15183.07,9574.56 15165.7,9565.27 15165.05,9564.84 15162.42,9563.08 15147.2,9550.59 15144.41,9547.8 15131.92,9532.58 15130.45,9530.39 15129.73,9529.3 15120.44,9511.93 15118.93,9508.29 15113.22,9489.44 15112.45,9485.57 15110.52,9465.97 15110.52,9464.96 15110.42,9463.96 15110.82,9256.1 10695.18,9256.1 10695.58,9463.96 10695.48,9464.96 10695.48,9465.97 10693.55,9485.57 10692.78,9489.44 10687.07,9508.29 10685.56,9511.93 10676.27,9529.3 10675.84,9529.95 10674.08,9532.58 10661.59,9547.8 10658.8,9550.59 10643.58,9563.08 10641.39,9564.55 10640.3,9565.27 10622.93,9574.56 10619.29,9576.07 10600.44,9581.78 10596.57,9582.55 10576.97,9584.48 10575.98,9584.48 10575,9584.58 10574.02,9584.48 10573.03,9584.48 10572.06,9584.29 10571.08,9584.19 10570.76,9584.1 10367.1,9584.1 10367.1,11639.9 10570.76,11639.9 10571.08,11639.81 10572.06,11639.71 10573.03,11639.52 10574.02,11639.52 10575,11639.42 10575.98,11639.52 10576.97,11639.52 10596.57,11641.45 10600.44,11642.22 10619.29,11647.93 10622.93,11649.44 10640.3,11658.73 10641.39,11659.45 10643.58,11660.92 10658.8,11673.41 10661.59,11676.2 10674.08,11691.42 10675.84,11694.05 10676.27,11694.7 10685.56,11712.07 10687.07,11715.71 10692.78,11734.56 10693.55,11738.43 10695.48,11758.03 10695.48,11759.04 10695.58,11760.04 10695.18,11967.9 15110.83,11967.9
V_3.3 on Voltage Plane (split plane): 15110.42,11760.04 15110.52,11759.04 15110.52,11758.03 15112.45,11738.43 15113.22,11734.56 15118.93,11715.71 15120.44,11712.07 15129.73,11694.7 15130.45,11693.61 15131.92,11691.42 15144.41,11676.2 15147.2,11673.41 15162.42,11660.92 15165.05,11659.16 15165.7,11658.73 15183.07,11649.44 15186.71,11647.93 15205.56,11642.22 15209.43,11641.45 15229.03,11639.52 15230.02,11639.52 15231,11639.42 15231.98,11639.52 15232.97,11639.52 15233.94,11639.71 15234.92,11639.81 15235.24,11639.9 15438.9,11639.9 15438.9,9584.1 15235.24,9584.1 15234.92,9584.19 15233.94,9584.29 15232.97,9584.48 15231.98,9584.48 15231,9584.58 15230.02,9584.48 15229.03,9584.48 15209.43,9582.55 15205.56,9581.78 15186.71,9576.07 15183.07,9574.56 15165.7,9565.27 15165.05,9564.84 15162.42,9563.08 15147.2,9550.59 15144.41,9547.8 15131.92,9532.58 15130.45,9530.39 15129.73,9529.3 15120.44,9511.93 15118.93,9508.29 15113.22,9489.44 15112.45,9485.57 15110.52,9465.97 15110.52,9464.96 15110.42,9463.96 15110.82,9256.1 10695.18,9256.1 10695.58,9463.96 10695.48,9464.96 10695.48,9465.97 10693.55,9485.57 10692.78,9489.44 10687.07,9508.29 10685.56,9511.93 10676.27,9529.3 10675.84,9529.95 10674.08,9532.58 10661.59,9547.8 10658.8,9550.59 10643.58,9563.08 10641.39,9564.55 10640.3,9565.27 10622.93,9574.56 10619.29,9576.07 10600.44,9581.78 10596.57,9582.55 10576.97,9584.48 10575.98,9584.48 10575,9584.58 10574.02,9584.48 10573.03,9584.48 10572.06,9584.29 10571.08,9584.19 10570.76,9584.1 10367.1,9584.1 10367.1,11639.9 10570.76,11639.9 10571.08,11639.81 10572.06,11639.71 10573.03,11639.52 10574.02,11639.52 10575,11639.42 10575.98,11639.52 10576.97,11639.52 10596.57,11641.45 10600.44,11642.22 10619.29,11647.93 10622.93,11649.44 10640.3,11658.73 10641.39,11659.45 10643.58,11660.92 10658.8,11673.41 10661.59,11676.2 10674.08,11691.42 10675.84,11694.05 10676.27,11694.7 10685.56,11712.07 10687.07,11715.71 10692.78,11734.56 10693.55,11738.43 10695.48,11758.03 10695.48,11759.04 10695.58,11760.04 10695.18,11967.9 15110.83,11967.9

## Other copper
Ground Plane (plane layer: these items are gaps in the copper):
  pour cut-out: 12690,10534 12663,10507 12690,10480 12717,10507
  pour cut-out: 12690,10637 12717,10664 12690,10691 12663,10664
  pour cut-out: 12690,10716 12717,10743 12690,10770 12663,10743
  pour cut-out: 11085,10464 11085,10461 11101,10461 11101,10464
  pour cut-out: 12690,10559 12717,10586 12690,10613 12663,10586
Voltage Plane (plane layer: these items are gaps in the copper):
  pour cut-out: 12690,10480 12717,10507 12690,10534 12663,10507
  pour cut-out: 12690,10559 12717,10586 12690,10613 12663,10586
  pour cut-out: 12690,10637 12717,10664 12690,10691 12663,10664
  pour cut-out: 12690,10716 12717,10743 12690,10770 12663,10743

## Silkscreen, mask and mechanical layers (free items; w line width, h text height)
Top Overlay:
  lines w5: 12132,11345 10850,11345 10850,9805 12850,9805 12850,11345 12708,11345 ; 12228,11345 12412,11345
  lines w10: 13890,9740 ccw(c14025,9885) 14170,9750 ; 13925,9875 13925,9940 ; 14000,9800 14025,9825 14025,9900 ; 14120,9875 14120,9940
  text "You FoUnD Me!" at 15390,10470 h60 r90
  text "Henry Jenkins" at 13030,10435 h30 r90
  text "Wim Looman" at 13080,10435 h30 r90
  text "Simon Richards" at 13125,10435 h30 r90
  text "Zac Taylor" at 13170,10435 h30 r90
  text "Revision 1" at 13000,10335 h60
  text "2011-06-07" at 12995,10245 h60
  text "https://github.com/Nemo157/mariokart" at 10791,9760 h30
  text "ENEL427 - Mariokart" at 12967,9719 h60 r90

## Text inside footprints (layer, text, board x,y; h text height)
P2: Top Overlay "PCB Edge" at 15245,10100 h40 r304.7
P_Batt: Top Overlay "1" at 14990,11950 h40 r270
P_Break_&_Limit: Top Overlay "1" at 14580,9374 h50; Top Overlay "2" at 14560,9474 h50; Top Overlay "5" at 14920,9374 h50; Top Overlay "6" at 14920,9474 h50
P_Ext_Pwr: Top Overlay "1" at 14450,11950 h40 r270